# EAGLE board dropweight_test v11 (EAGLE 9.7.0)
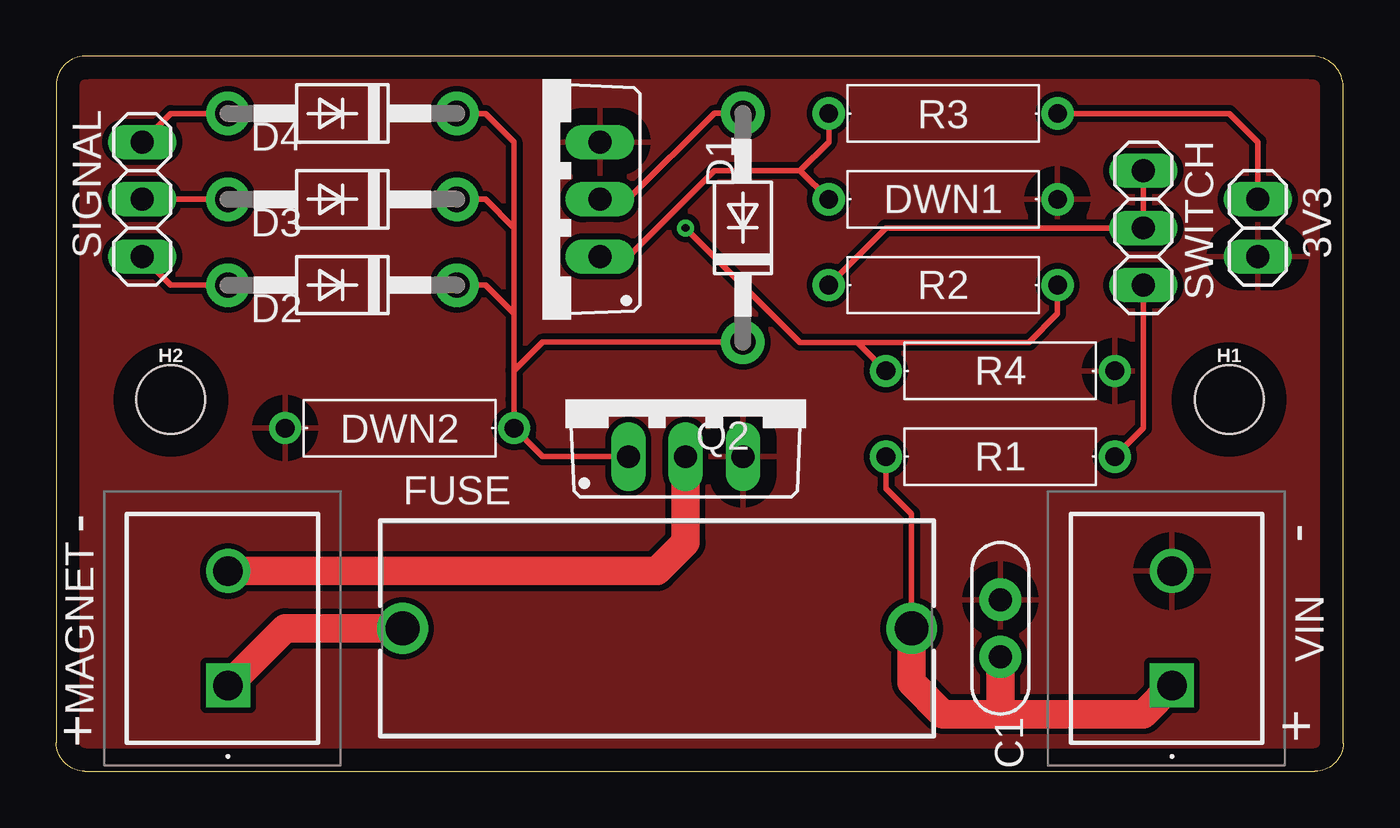
[diagram p0: board, top side]
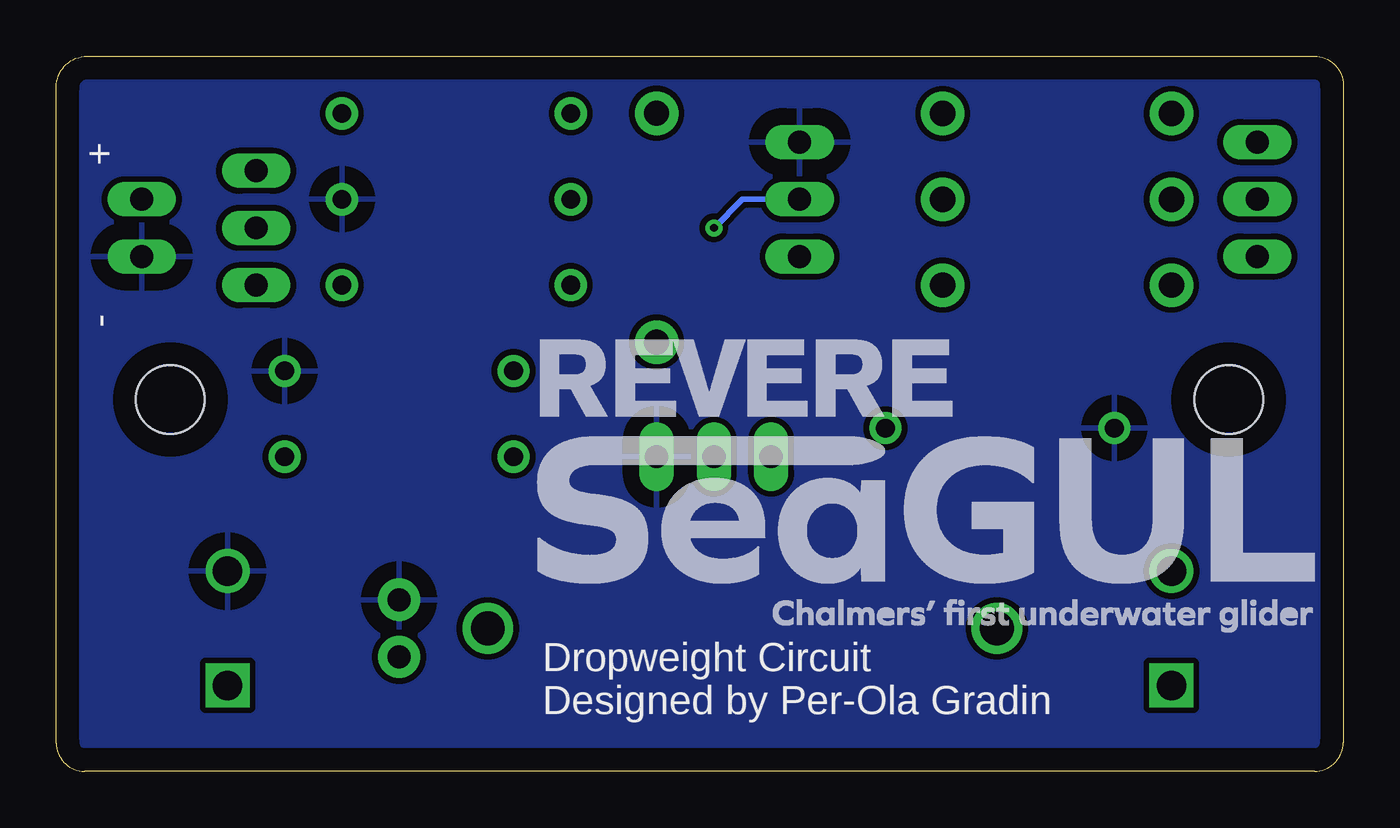
[diagram p1: board, bottom side, seen from below]

Size 57.13 x 31.75 mm. Coordinates in mm from the lower left corner, seen from the top.
Outline: 1.27,0 55.88,0 arc90 57.13,1.25 57.13,30.39 arc90 55.77,31.75 1.27,31.75 arc90 0,30.48 0,1.27 arc90 1.27,0
Copper layers (1*16): Top 0.035mm / dielectric 1.5mm / Bottom 0.035mm
Design rules "default *": minimum track width 6mil, minimum drill 0.35mm, track to track 6mil, track to pad 6mil, pad to pad 6mil, via to via 6mil, smd to smd 6mil, copper to edge 40mil, drill to drill 6mil, minimum pad ring 10mil, minimum via ring 8mil, stop-mask expansion 4mil, vias tented up to drill 0mil, thermal gap 0.75mm

## Footprints (pad centres in the part's own frame; a part is rotated, then mirrored left to right if it is on the bottom)
1X02 = drill 1.016 long: 1 -1.27,0; 2 1.27,0
CAP-THRU-2.54MM = drill 1.016 pad 1.88: 1 -1.27,0; 2 1.27,0
DO41-10 = drill 1.118 pad 1.93: A 5.08,0; C -5.08,0
RESAD1016W63L850D250B = drill 0.83 pad 1.43: 1 -5.08,0; 2 5.08,0
696108003002 = drill 1.5: 1 -11.3,0; 2 11.3,0
STAND-OFF-TIGHT = hole 3.048: 0,0
CTBP05082 = drill 1.3 pad 1.95 square: 1 0,0 | drill 1.3 pad 1.95: 2 5.08,0
TO220BV = drill 1.016 long: D 0,-2.54; G -2.54,-2.54; S 2.54,-2.54
1X03 = drill 1.016 long: 1 -2.54,0; 2 0,0; 3 2.54,0

## Placement (x,y rotation side)
3V3  PINHD-1X02_1X02M  [1X02]  53.34,24.13 90 top
C1  [CAP-THRU-2.54MM]  41.91,6.35 90 top
D1  1N4004  [DO41-10]  30.48,24.14 90 top
D2  1N4004  [DO41-10]  12.7,21.59 180 top
D3  1N4004  [DO41-10]  12.7,25.4 180 top
D4  1N4004  [DO41-10]  12.7,29.21 180 top
DWN1  [RESAD1016W63L850D250B]  39.37,25.4 180 top
DWN2  [RESAD1016W63L850D250B]  15.24,15.24 0 top
FUSE  696108003002  [696108003002]  26.67,6.35 0 top
H1  STAND-OFFTIGHT  [STAND-OFF-TIGHT]  52.07,16.51 0 top
H2  STAND-OFFTIGHT  [STAND-OFF-TIGHT]  5.08,16.51 0 top
MAGNET  CTBP0508_2  [CTBP05082]  7.62,3.81 90 top
Q1  NMOSFET  [TO220BV]  21.59,25.4 90 top
Q2  NMOSFET  [TO220BV]  27.94,16.51 0 top
R1  [RESAD1016W63L850D250B]  41.91,13.97 180 top
R2  [RESAD1016W63L850D250B]  39.37,21.59 180 top
R3  [RESAD1016W63L850D250B]  39.37,29.21 0 top
R4  [RESAD1016W63L850D250B]  41.91,17.78 180 top
SIGNAL  PINHD-1X3  [1X03]  3.81,25.4 90 top
SWITCH  [1X03]  48.26,24.13 270 top
VIN  CTBP0508_2  [CTBP05082]  49.53,3.81 90 top

## Library data of the parts
3V3 C1 DWN1 DWN2 R1-R4 = Tinkercad
D1-D4 = adafruit
FUSE = Wurth_Connectors_WR-FSH; DATASHEET-URL: https://www.we-online.com/catalog/datasheet/696108003002.pdf; IR-UL: 20A; IR-VDE: 6.3A; MATES: 696122003001; PART-NUMBER: 696108003002
H1 H2 = SparkFun-Hardware
MAGNET VIN = CTBP0508_2; DESCRIPTION: Conn Terminal Block F 2 POS 5.08mm Solder ST Thru-Hole 8A; HEIGHT: 10.2mm; MANUFACTURER_NAME: CAMDENBOSS; MANUFACTURER_PART_NUMBER: CTBP0508/2
Q1 Q2 = Tinkercad; CATEGORY: Transistor; SUB-CATEGORY: MOSFET; TYPE: N-Channel
SIGNAL = Connector; CATEGORY: Headers; DESCRIPTION: Header, Straight, 3 Position; MANUFACTURER: Generic; MPN: Generic; OPERATING_TEMPERATURE: Generic; PART_STATUS: Active; PITCH: 0.100" (2.54mm); ROHS_COMPLIANCE: Generic; SERIES: Generic; SUB-CATEGORY: Headers, Male Pins; TYPE: Board to Board or Cable, Unshrouded, Through Hole, Straight
SWITCH = Airquality_Sensor

## Nets
3V3: 3V3.2 R3.2
+12V: C1.1 FUSE.2 R1.2 VIN.1
GND [New Class]: 3V3.1 C1.2 DWN1.1 DWN2.1 Q1.S Q2.S R4.1 VIN.2
N$1: R1.1 SWITCH.3
N$2: R2.2 SWITCH.1 SWITCH.2
N$3: D1.A Q1.D R2.1 R4.2
N$4: DWN1.2 Q1.G R3.1
N$6: MAGNET.2 Q2.D
N$7: D3.A SIGNAL.2
N$8: D4.A SIGNAL.3
N$9: D2.A SIGNAL.1
N$10: FUSE.1 MAGNET.1
N$11: D1.C D2.C D3.C D4.C DWN2.2 Q2.G

## Tracks (layer width: path | path; a pad name or v marks a point on that pad's centre or on a via)
3V3
  Top 0.254: 3V3.2 53.34,27.94 52.07,29.21 R3.2
+12V
  Top 0.254: R1.2 36.83,12.57 37.97,11.43 FUSE.2
  Top 1.27: VIN.1 48.26,2.54 41.91,2.54 | 41.91,2.54 39.37,2.54 37.97,3.94 FUSE.2 | 41.91,2.54 C1.1
GND
  pour Top (isolate 0.254): 1.28,0.13 55.87,0.13 56.07,0.14 56.26,0.2 56.44,0.28 56.6,0.39 56.74,0.53 56.85,0.69 56.93,0.87 56.99,1.06 57,1.26 57,30.38 56.98,30.6 56.93,30.81 56.84,31.01 56.71,31.18 56.56,31.33 56.39,31.46 56.19,31.55 55.98,31.6 55.76,31.62 1.28,31.62 1.07,31.61 0.88,31.55 0.7,31.47 0.54,31.36 0.39,31.21 0.28,31.05 0.2,30.87 0.14,30.68 0.13,30.47 0.13,1.28 0.14,1.07 0.2,0.88 0.28,0.7 0.39,0.54 0.54,0.39 0.7,0.28 0.88,0.2 1.07,0.14
  pour Bottom (isolate 0.254): 1.28,0.13 55.87,0.13 56.07,0.14 56.26,0.2 56.44,0.28 56.6,0.39 56.74,0.53 56.85,0.69 56.93,0.87 56.99,1.06 57,1.26 57,30.38 56.98,30.6 56.93,30.81 56.84,31.01 56.71,31.18 56.56,31.33 56.39,31.46 56.19,31.55 55.98,31.6 55.76,31.62 1.28,31.62 1.07,31.61 0.88,31.55 0.7,31.47 0.54,31.36 0.39,31.21 0.28,31.05 0.2,30.87 0.14,30.68 0.13,30.47 0.13,1.28 0.14,1.07 0.2,0.88 0.28,0.7 0.39,0.54 0.54,0.39 0.7,0.28 0.88,0.2 1.07,0.14
N$1
  Top 0.254: SWITCH.3 48.26,15.24 R1.1
N$2
  Top 0.254: SWITCH.1 SWITCH.2 36.83,24.13 R2.2
N$3  (via drill 0.35)
  Top 0.254: R2.1 44.45,20.32 43.18,19.05 35.56,19.05 | 35.56,19.05 33.02,19.05 v27.94,24.13 | R4.2 35.56,19.05 | D1.A 29.21,29.22 25.39,25.4 Q1.D
  Bottom 0.254: v27.94,24.13 26.67,25.4 Q1.D
N$4
  Top 0.254: R3.1 34.29,27.94 33.02,26.67 | DWN1.2 33.02,26.67 | 33.02,26.67 29.21,26.67 25.4,22.86 Q1.G
N$6
  Top 1.27: MAGNET.2 26.67,8.89 27.94,10.16 Q2.D
N$7
  Top 0.254: SIGNAL.2 D3.A
N$8
  Top 0.254: SIGNAL.3 5.08,29.21 D4.A
N$9
  Top 0.254: SIGNAL.1 5.08,21.59 D2.A
N$10
  Top 1.27: MAGNET.1 10.16,6.35 FUSE.1
N$11
  Top 0.254: D4.C 19.05,29.21 20.32,27.94 20.32,24.13 | 20.32,24.13 20.32,20.32 | D3.C 19.05,25.4 20.32,24.13 | D2.C 19.05,21.59 20.32,20.32 | Q2.G 21.59,13.97 DWN2.2 20.32,16.51 20.32,17.8 | D1.C 21.58,19.06 20.32,17.8 | 20.32,20.32 20.32,17.8

## Text on the board
tNames: - | - | + | +
bNames: + | - | Dropweight Circuit / Designed by Per-Ola Gradin